# Altium PCB NTC Thermistor 100K VDiv Card.PcbDoc
Units mm, origin at the board's own origin, x right, y up, seen from the top; angles counter-clockwise.
Board outline 60 x 25 mm, 2 copper layers (Top Layer, Bottom Layer), stack 1.621 mm thick; 7 components, 15 nets, 87 pads, 20 vias.
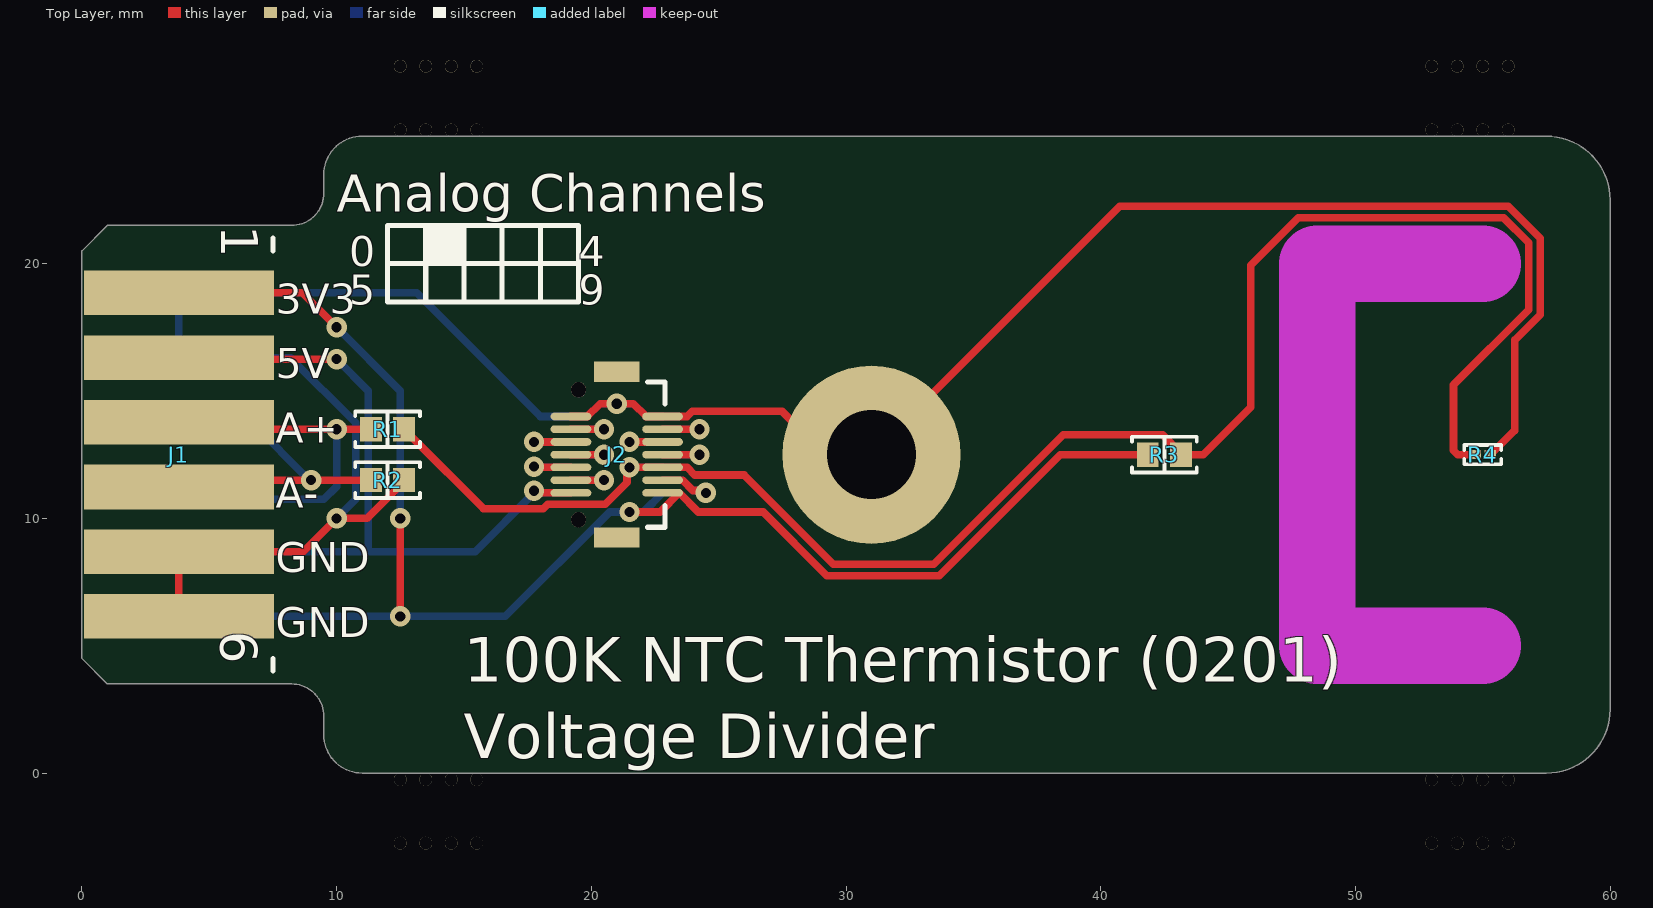
[diagram p0: Top Layer view]
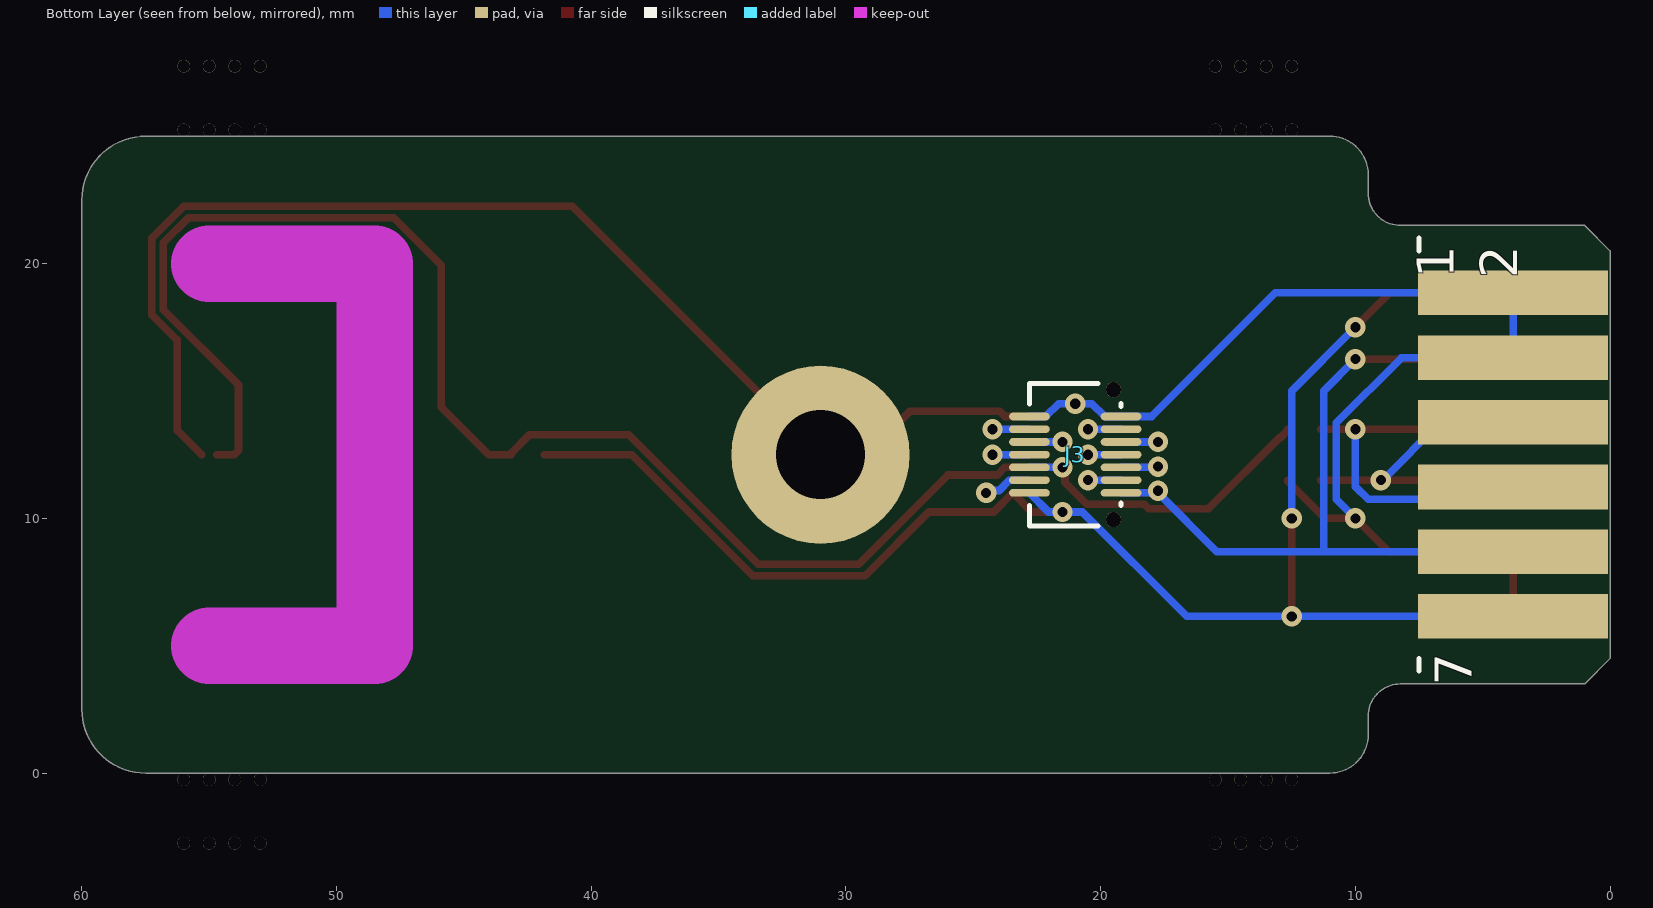
[diagram p1: Bottom Layer view, seen from below]
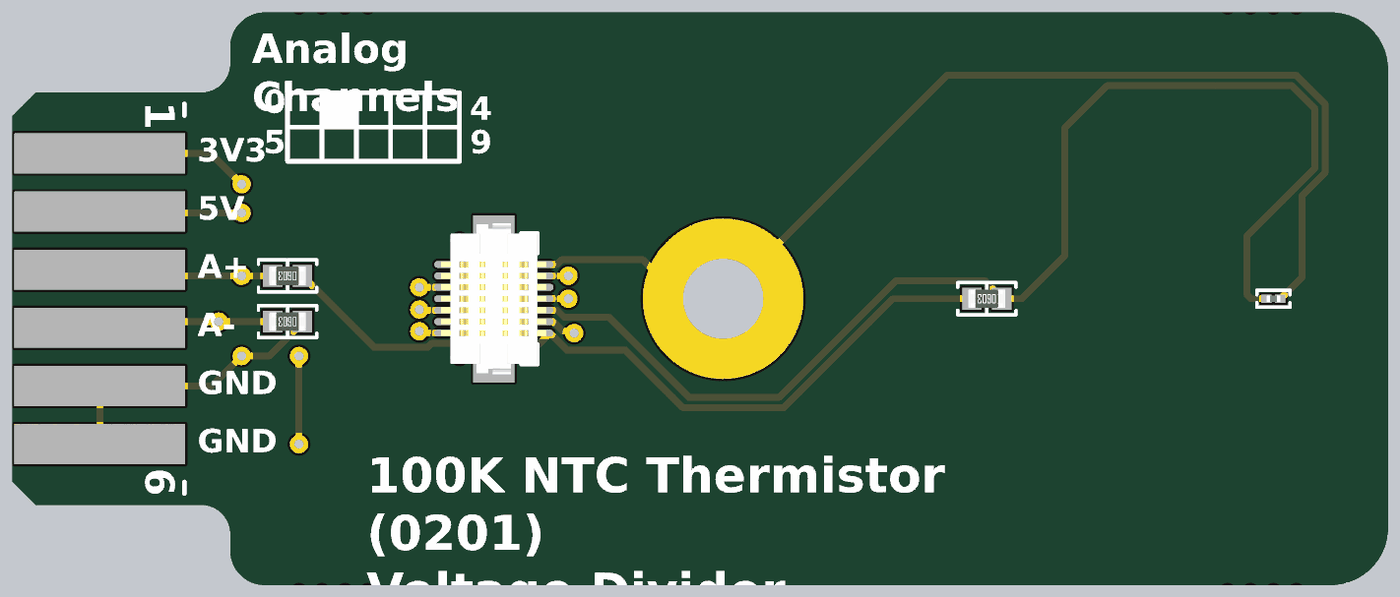
[diagram p2: 3D render of the assembled board from above, using the file's embedded part models]

## Layer stack, top to bottom
Top Solder: solder mask 0.0102, Solder Resist, Dk 3.5
Top Layer: signal copper 0.0356
Dielectric1: core 1.55, FR-4, Dk 4.8
Bottom Layer: signal copper 0.0356
Bottom Solder: solder mask 0.0102, Solder Resist, Dk 3.5

## Board outline
0,4.5 1,3.5 8.23,3.5 cw(c8.23,2.23) 9.5,2.23 9.5,1.5 ccw(c11,1.5) 11,0 57.5,0 ccw(c57.5,2.5) 60,2.5 60,22.5 ccw(c57.5,22.5) 57.5,25 11,25 ccw(c11,23.5) 9.5,23.5 9.5,22.77 cw(c8.23,22.77) 8.23,21.5 1,21.5 0,20.5

## Design rules (kind name [scope] priority, off if disabled: settings)
Clearance PadClearance [IsPad vs IsPad] p1: gap=0.15 ignorepadtopadclearanceinfootprint=FALSE
Clearance [All] p2: gap=0.15 ignorepadtopadclearanceinfootprint=FALSE
HoleSize [All] p1: absolutevalues=TRUE maxlimit=6 minlimit=0.4 maxpercent=80.000 minpercent=20.000
HoleToHoleClearance [All] p1: gap=0.2 allowstackedmicrovias=TRUE
MinimumSolderMaskSliver [All] p1: minsoldermaskwidth=0
PolygonConnect ViaConnect [IsVia] p1: connectstyle=Direct reliefconductorwidth=0.254 reliefentries=4 polygonreliefangle="90 Angle" airgapwidth=0.254
PolygonConnect [All] p2: connectstyle=Direct reliefconductorwidth=0.3 reliefentries=4 polygonreliefangle="90 Angle" airgapwidth=0.254
RoutingVias [All] p1: holewidth=0.6 width=1 viastyle="Through Hole" minholewidth=0.4 minwidth=0.8 maxholewidth=5 maxwidth=6
SilkToSilkClearance [All] p1: silktosilkclearance=0
SilkToSolderMaskClearance SilkscreenOverComponentPads [IsPad] p1: minsilkscreentomaskgap=0.05 clearancetoexposedcopper=TRUE
SolderMaskExpansion "Via Tenting" [IsVia] p1: expansion=-2 istentingtop=FALSE
SolderMaskExpansion [All] p2: expansion=0.102 istentingtop=FALSE
Width [All] p1: maxlimit=2 minlimit=0.2 preferedwidth=0.4
25 further rules are at their usual default settings.

## Components (designator, comment, footprint, x,y, rotation, side; value= is the part's Value field where it differs from the comment)
J1 "12 Pin Dual Row" "TE 5650118-3 Card Edge" 0,12.5 r270 top
J2 "DF12(3.0)-14DP-0.5V(86)" "HIROSE DF12 3.0-14DP-0.5V 86" 21,12.5 r90 top
J3 "DF12A(3.0)-14DS-0.5V(81)" "HIROSE DF12A 3.0-14DS-0.5V 81" 21,12.5 r270 bottom
R1 "0 Ohms" "RES 0603_1608" 12,13.5 r180 top
R2 "0 Ohms" "RES 0603_1608" 12,11.5 r180 top
R3 "100 kOhms" "RES 0603_1608" 42.5,12.5 r180 top
R4 "NCP03WF104F05RL" "NTC 0201_0603" 55,12.5 r0 top

## Footprints (in the part's own frame and the unit in brackets; to place one, negate y for a bottom-side part, rotate by r counter-clockwise, add the part's x,y. Pads: shape width x height; smd on the part's side, far side on the other; paste and mask are expansions set on the pad)
"HIROSE DF12 3.0-14DP-0.5V 86" [mm] "14 Position Connector Header, 0.50mm Pitch,5.7x3.8mm Body"
  oval 0.3x1.6 smd: 1(-1.5,-1.8) 2(-1,-1.8) 3(-0.5,-1.8) 4(0,-1.8) 5(0.5,-1.8) 6(1,-1.8) 7(1.5,-1.8) 8(1.5,1.8) 9(1,1.8) 10(0.5,1.8) 11(0,1.8) 12(-0.5,1.8) 13(-1,1.8) 14(-1.5,1.8)
  round 0.6 hole 0.6 unplated: B(-2.55,1.5) B(2.55,1.5)
  rect 0.8x1.8 smd: M(-3.25,0) M(3.25,0)
  silkscreen extent -2.85,-1.9 2.85,-1.2, body extent -3.3,-2.3 3.3,2.3, height 2.3
"HIROSE DF12A 3.0-14DS-0.5V 81" [mm] "14 Position Connector Receptacle, 0.50mm Pitch,5.60x3.60mm Body"
  oval 0.3x1.6 smd: 1(1.5,-1.8) 2(1,-1.8) 3(0.5,-1.8) 4(0,-1.8) 5(-0.5,-1.8) 6(-1,-1.8) 7(-1.5,-1.8) 8(-1.5,1.8) 9(-1,1.8) 10(-0.5,1.8) 11(0,1.8) 12(0.5,1.8) 13(1,1.8) 14(1.5,1.8)
  round 0.6 hole 0.6 unplated: B(-2.55,1.5) B(2.55,1.5)
  silkscreen extent -2.8,-1.8 2.8,1.8, body extent -2.8,-2.3 2.8,2.3, height 2.2
"NTC 0201_0603" [mm] "Chip Thermisistor, 2-Leads, Body 0.60x0.30mm, IPC Medium Density"
  rect 0.45x0.35 smd: 1(-0.3,0) 2(0.3,0)
  silkscreen extent -0.72,-0.38 0.72,0.38, body extent -0.3,-0.15 0.3,0.15, height 0.3
"RES 0603_1608" [mm] "Chip Resistor, 2-Leads, Body 1.60x0.80mm, IPC Medium Density"
  rect 0.85x0.95 smd: 1(-0.65,0) 2(0.65,0)
  silkscreen extent -1.27,-0.7 1.27,0.7, body extent -0.8,-0.4 0.8,0.4, height 0.45
"TE 5650118-3 Card Edge" [mm] "Card Edge contacts for TE Connector"
  rect 1.75x7.46 smd: 1(-6.35,3.81) 2(-3.81,3.81) 3(-1.27,3.81) 4(1.27,3.81) 5(3.81,3.81) 6(6.35,3.81)
  rect 1.75x7.46 smd far side: 7(6.35,3.81) 8(3.81,3.81) 9(1.27,3.81) 10(-1.27,3.81) 11(-3.81,3.81) 12(-6.35,3.81)
  silkscreen extent -8.5,7.5 8.5,7.5

## Part data
J2: "CONN HDR 14POS SMD GOLD", Manufacturer="Hirose Electric Co Ltd", Supplier Part Number 1=H11701CT-ND, ComponentLink1Description=Datasheet, ComponentLink1URL=https://www.hirose.com/product/download/?distributor=digikey&type=specSheet&lang=en&num=DF12(3.0)-14DP-0.5V(86), ComponentLink2Description="DigiKey Link", ComponentLink2URL=http://digikey.com/product-detail/en/hirose-electric-co-ltd/DF12-3.0-14DP-0.5V-86/H11701CT-ND/2172493, Connector Type="Header, Outer Shroud Contacts", Contact Finish=Gold, Contact Finish Thickness="8.00µin (0.203µm)", Features="Board Guide, Solder Retention", Height Above Board="0.091\" (2.30mm)", LastUpdated="06/08/2020 22:47:47", Lifecycle Status=Active, Mated Stacking Heights=3mm, Minimum Order=1, Mounting Type="Surface Mount", Number of Positions=14, Number of Rows=2, Packaging=TapeAndReel, Part Number=DF12(3.0)-14DP-0.5V(86), Part Status=Active, Pitch="0.020\" (0.50mm)", Price=0.38, Series=DF12, Supplier 1=DigiKey
J3: "CONN RCPT 14POS SMD GOLD", Manufacturer="Hirose Electric Co Ltd", Supplier Part Number 1=H11713CT-ND, ComponentLink1Description=Datasheet, ComponentLink1URL=https://www.hirose.com/product/document?clcode=CL0537-0721-0-86&productname=DF12(3.0)-10DP-0.5V(86)&series=DF12&documenttype=Catalog&lang=en&documentid=D31693_en, ComponentLink2Description="DigiKey Link", ComponentLink2URL=http://digikey.com/product-detail/en/hirose-electric-co-ltd/DF12A-3.0-14DS-0.5V-81/H11713CT-ND/2172505, Connector Type="Receptacle, Center Strip Contacts", Contact Finish=Gold, Contact Finish Thickness="8.00µin (0.203µm)", Features="Board Guide", Height Above Board="0.087\" (2.20mm)", LastUpdated="06/08/2020 22:48:47", Lifecycle Status=Active, Mated Stacking Heights=3mm, Minimum Order=1, Mounting Type="Surface Mount", Number of Positions=14, Number of Rows=2, Packaging=TapeAndReel, Part Number=DF12A(3.0)-14DS-0.5V(81), Part Status=Active, Pitch="0.020\" (0.50mm)", Price=0.36, Series=DF12, Supplier 1=DigiKey
R1 R2: library part ERJ-3GEY0R00V, "RES SMD 0 OHM JUMPER 1/10W 0603", Device Package="0603 (1608 Metric)", Manufacturer="Panasonic Electronic Components", Operating Temperature="-55°C ~ 155°C", Power (Watts)="0.1W, 1/10W", Ratings=AEC-Q200, Supplier Device Package=0603, Supplier Part Number 1=P0.0GCT-ND, Tolerance=Jumper, ComponentLink1Description=Datasheet, ComponentLink1URL=http://industrial.panasonic.com/www-cgi/jvcr13pz.cgi?E+PZ+3+AOA0001+ERJ3GEY0R00V+7+WW, ComponentLink2Description="DigiKey Link", ComponentLink2URL=http://digikey.com/product-detail/en/panasonic-electronic-components/ERJ-3GEY0R00V/P0.0GCT-ND/134711, Composition="Thick Film", Features="Automotive AEC-Q200", Height - Seated (Max)="0.022\" (0.55mm)", LastUpdated="13/08/2020 10:36:40", Lifecycle Status=Active, Minimum Order=1, Number of Terminations=2, Package / Case="0603 (1608 Metric)", Packaging=CutTape, Part Number=ERJ-3GEY0R00V, Part Status=Active, PartId=22603, Price=0.10, Resistance="0 Ohms", Series=ERJ, Size / Dimension="0.063\" L x 0.031\" W (1.60mm x 0.80mm)", Supplier 1=DigiKey
R3: library part ERJ-3EKF1003V, "RES SMD 100K OHM 1% 1/10W 0603", Device Package="0603 (1608 Metric)", Manufacturer="Panasonic Electronic Components", Operating Temperature="-55°C ~ 155°C", Power (Watts)="0.1W, 1/10W", Ratings=AEC-Q200, Supplier Device Package=0603, Supplier Part Number 1=P100KHCT-ND, Temperature Coefficient=±100ppm/°C, Tolerance=±1%, ComponentLink1Description=Datasheet, ComponentLink1URL=https://industrial.panasonic.com/cdbs/www-data/pdf/RDA0000/AOA0000C304.pdf, ComponentLink2Description="DigiKey Link", ComponentLink2URL=http://digikey.com/product-detail/en/panasonic-electronic-components/ERJ-3EKF1003V/P100KHCT-ND/198110, Composition="Thick Film", Features="Automotive AEC-Q200", Height - Seated (Max)="0.022\" (0.55mm)", LastUpdated="21/01/2020 00:14:57", Lifecycle Status=Active, Minimum Order=1, Number of Terminations=2, Package / Case="0603 (1608 Metric)", Packaging=TapeAndReel, Part Number=ERJ-3EKF1003V, Part Status=Active, PartId=25699, Price=0.01, Resistance="100 kOhms", Series=ERJ, Size / Dimension="0.063\" L x 0.031\" W (1.60mm x 0.80mm)", Supplier 1=DigiKey
R4: "THERM NTC 100KOHM 4250K 0201", B Value Tolerance=±1%, Device Package="0201 (0603 Metric)", Manufacturer="Murata Electronics", Operating Temperature="-40°C ~ 125°C", Power - Max=100mW, Resistance in Ohms @ 25°C=100k, Supplier Part Number 1=490-12807-1-ND, B25/50=4250K, B25/85=4311K, B25/100=4334K, ComponentLink1Description=Datasheet, ComponentLink1URL=https://www.murata.com/~/media/webrenewal/support/library/catalog/products/thermistor/ntc/r44e.ashx?la=en-us, ComponentLink2Description="DigiKey Link", ComponentLink2URL=http://digikey.com/product-detail/en/murata-electronics/NCP03WF104F05RL/490-12807-1-ND/4422351, LastUpdated="27/05/2020 17:24:26", Lifecycle Status=Active, Minimum Order=1, Mounting Type="Surface Mount", Package / Case="0201 (0603 Metric)", Packaging=TapeAndReel, Part Number=NCP03WF104F05RL, Part Status=Active, PartId=672, Price=0.09, Resistance Tolerance=±1%, Series=NCP03, Supplier 1=DigiKey

## Free pads (board coordinates)
  round 7 hole 3.5: M(31,12.5)
  round 0.5 hole 0.5 unplated: N(12.5,-2.75) N(12.5,-0.25) N(12.5,25.25) N(12.5,27.75) N(13.5,-2.75) N(13.5,-0.25) N(13.5,25.25) N(13.5,27.75) N(14.5,-2.75) N(14.5,-0.25) N(14.5,25.25) N(14.5,27.75) N(15.5,-2.75) N(15.5,-0.25) N(15.5,25.25) N(15.5,27.75) N(53,-2.75) N(53,-0.25) N(53,25.25) N(53,27.75) N(54,-2.75) N(54,-0.25) N(54,25.25) N(54,27.75) N(55,-2.75) N(55,-0.25) N(55,25.25) N(55,27.75) N(56,-2.75) N(56,-0.25) N(56,25.25) N(56,27.75)

## Via types
v1: diameter 0.8, hole 0.4, Top Layer to Bottom Layer, 20 vias

## Nets (pads, with @x,y where several pads share a name; then routed paths per layer and width w, separated by ;. In a path a pad name is that pad's centre, name@x,y a point inside that pad or via, vN(x,y) a via of type N, cw(c..) or ccw(c..) an arc to the next point about the centre after c; other vN are vias at no path point)
3V3: J1.1 J1.7 J2.1 J3.1 R3.2 | length 64.1
  Top Layer w0.3: J1.1 8.65,18.85 v1(10,17.5) ; v1(12.5,6.15) v1(12.5,10) ; v1(21.5,10.25) 22.7,10.25 23.45,11 24.2,10.25 26.75,10.25 29.25,7.75 33.662,7.75 38.412,12.5 R3.2
  Bottom Layer w0.3: J1.7 v1(12.5,6.15) 16.619,6.15 20.719,10.25 v1(21.5,10.25) 22.05,10.25 J3.1 ; v1(10,17.5) 12.5,15 v1(12.5,10)
5V: J1.2 J1.8 J2.14 J3.14 | length 32.2
  Top Layer w0.3: J1.2 3.87,16.25 v1(10,16.25) ; v1(17.75,11.08) 17.83,11 J2.14
  Bottom Layer w0.3: J1.8 11.25,8.69 ; v1(10,16.25) 11.25,15 11.25,8.69 ; J3.14 17.83,11 v1(17.75,11.08) 17.75,11 15.44,8.69 11.25,8.69
AD0: J2.2 J3.2 | length 3.8
  Top Layer w0.3: J2.2 23.586,11.5 23.992,11.094 24.406,11.094 v1(24.5,11)
  Bottom Layer w0.3: J3.2 23.586,11.5 23.992,11.094 24.406,11.094 v1(24.5,11)
AD1: J2.3 J3.3 R1.1 R3.1 R4.1 | length 69.6
  Top Layer w0.3: R1.1 12.65,13.45 12.925,13.175 12.975,13.175 15.77,10.38 18.12,10.38 18.29,10.55 20.54,10.55 21.404,11.414 21.404,11.904 v1(21.5,12) J2.3 23.76,12 24.06,11.7 26,11.7 29.5,8.2 33.45,8.2 38.525,13.275 42.425,13.275 43.15,12.55 R3.1 44.025,12.5 45.89,14.365 45.89,19.935 47.754,21.8 55.814,21.8 56.8,20.814 56.8,18.186 53.849,15.236 53.849,12.676 54.025,12.5 R4.1
  Bottom Layer w0.3: v1(21.5,12) J3.3
AD2: J2.4 J3.4 | length 2.9
  Top Layer w0.3: J2.4 v1(24.25,12.5)
  Bottom Layer w0.3: J3.4 v1(24.25,12.5)
AD3: J2.5 J3.5 | length 2.6
  Top Layer w0.3: v1(21.5,13) J2.5
  Bottom Layer w0.3: v1(21.5,13) J3.5
AD4: J2.6 J3.6 | length 2.9
  Top Layer w0.3: J2.6 v1(24.25,13.5)
  Bottom Layer w0.3: J3.6 v1(24.25,13.5)
AD5: J2.13 J3.13 | length 2.6
  Top Layer w0.3: J2.13 v1(20.5,11.5)
  Bottom Layer w0.3: J3.13 v1(20.5,11.5)
AD6: J2.12 J3.12 | length 2.9
  Top Layer w0.3: v1(17.75,12.03) 17.78,12 J2.12
  Bottom Layer w0.3: v1(17.75,12.03) 17.78,12 J3.12
AD7: J2.11 J3.11 | length 2.6
  Top Layer w0.3: J2.11 v1(20.5,12.5)
  Bottom Layer w0.3: J3.11 v1(20.5,12.5)
AD8: J2.10 J3.10 | length 2.9
  Top Layer w0.3: v1(17.75,13) J2.10
  Bottom Layer w0.3: v1(17.75,13) J3.10
AD9: J2.9 J3.9 | length 2.6
  Top Layer w0.3: J2.9 v1(20.5,13.5)
  Bottom Layer w0.3: J3.9 v1(20.5,13.5)
AN_N: J1.4 J1.10 R2.2 | length 13.8
  Top Layer w0.3: J1.4 4.08,11.5 v1(9,11.5) R2.2
  Bottom Layer w0.3: J1.10 6.665,13.77 8.935,11.5 v1(9,11.5)
AN_P: J1.3 J1.9 R1.2 | length 16.5
  Top Layer w0.3: J1.3 4.08,13.5 v1(10,13.5) R1.2
  Bottom Layer w0.3: J1.9 4.29,10.75 9.5,10.75 10,11.25 v1(10,13.5)
GND: J1.5 J1.6 J1.11 J1.12 J2.7 J2.8 J3.7 J3.8 pad.M R2.1 R4.2 | length 101.7
  Top Layer w0.3: J1.6 J1.5 8.69,8.69 v1(10,10) 11.2,10 12.65,11.45 R2.1 ; J2.8 19.85,14 20.35,14.5 v1(21,14.5) 21.65,14.5 22.15,14 J2.7 23.76,14 23.96,14.2 27.487,14.2 29.187,12.5 pad.M 40.75,22.25 56,22.25 57.25,21 57.25,18 56.25,17 56.25,13.45 R4.2
  Bottom Layer w0.3: v1(10,10) 10.75,10.75 10.75,13.75 8.19,16.31 J1.11 J1.12 13.15,18.85 18,14 J3.8 19.85,14 20.35,14.5 v1(21,14.5) 21.65,14.5 22.15,14 J3.7
pads on no net: J2.B J2.M J3.B

## Keep-outs
Keep-Out Layer:
  lines w3: 55,5 48.5,5 48.5,20 55,20

## Silkscreen, mask and mechanical layers (free items; w line width, h text height)
Top Overlay:
  rectangle: 13.5,20 15,21.5
  lines w0.2: 12,20 12,18.5 13.5,18.5 ; 12,20 12,21.5 13.5,21.5 ; 12,20 13.5,20 ; 13.5,18.5 15,18.5 ; 13.5,18.5 13.5,20 ; 13.5,20 15,20 ; 13.5,20 13.5,21.5 ; 13.5,21.5 15,21.5 ; 15,18.5 16.5,18.5 ; 15,18.5 15,20 ; 15,20 16.5,20 ; 15,20 15,21.5 ; 15,21.5 16.5,21.5 ; 16.5,18.5 18,18.5 ; 16.5,18.5 16.5,20 ; 16.5,20 18,20 ; 16.5,20 16.5,21.5 ; 16.5,21.5 18,21.5 ; 18,18.5 19.5,18.5 19.5,20 ; 18,18.5 18,20 ; 18,20 19.5,20 ; 18,20 18,21.5 ; 18,21.5 19.5,21.5 19.5,20
  text "Analog Channels" at 10,21.546 h2.5
  text "0" at 10.5,19.5 h2
  text "4" at 19.5,19.5 h2
  text "5" at 10.5,18 h2
  text "9" at 19.5,18 h2
  text "3V3" at 7.62,17.647 h2
  text "5V" at 7.62,15.107 h2
  text "A+" at 7.62,12.567 h2
  text "A-" at 7.62,10.027 h2
  text "GND" at 7.62,7.485 h2
  text "GND" at 7.62,4.945 h2
  text "100K NTC Thermistor (0201) / Voltage Divider" at 15,0 h3
Bottom Overlay:
  text "Analog Temperature Sensor Card" at 38,0 h5
Outlines:
  the board outline again, w0.2
Route Tool Path:
  lines w3: 11,-1.5 cw(c11,1.5) 8,1.5 8,2 1,2 ; 11,26.5 ccw(c11,23.5) 8,23.5 8,23 1,23 ; 17,-1.5 51.5,-1.5 ; 17,26.5 51.5,26.5 ; 55,5 48.5,5 48.5,20 55,20 ; 57.5,-1.5 ccw(c57.5,2.5) 61.5,2.5 61.5,22.5 ccw(c57.5,22.5) 57.5,26.5 ; -1.5,4.5 ccw(c0,4.5) -1.061,3.439 ; -1.5,4.5 ccw(c0,4.5) -1.061,3.439 ; -1.5,4.5 -1.5,20.5 ; -1.5,20.5 cw(c0,20.5) -1.061,21.561 ; -1.5,20.5 cw(c0,20.5) -1.061,21.561 ; -1.061,3.439 -0.061,2.439 ; -1.061,21.561 -0.061,22.561 ; -0.061,2.439 ccw(c1,3.5) 1,2 ; -0.061,2.439 ccw(c1,3.5) 1,2 ; -0.061,22.561 cw(c1,21.5) 1,23 ; -0.061,22.561 cw(c1,21.5) 1,23

## Text inside footprints (layer, text, board x,y; h text height)
J1: Top Overlay "6" at 4.936,5.576 h2.5 r270; Top Overlay "1" at 4.991,21.498 h2.5 r270; Bottom Overlay "1 / 2" at 3.155,19.424 h2.5 r270; Bottom Overlay "7" at 4.936,3.424 h2.5 r270